# EAGLE board ya (EAGLE 9.0.1)
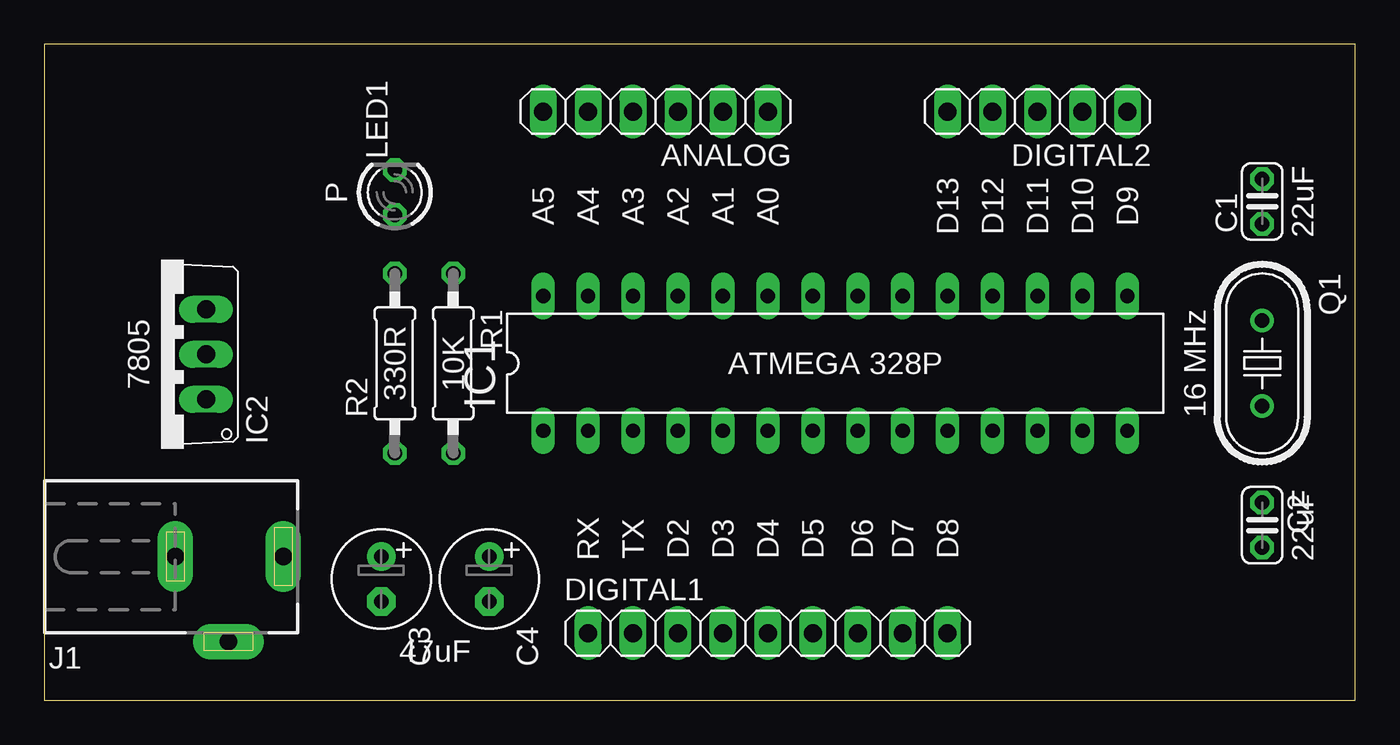
[diagram p0: board, top side]
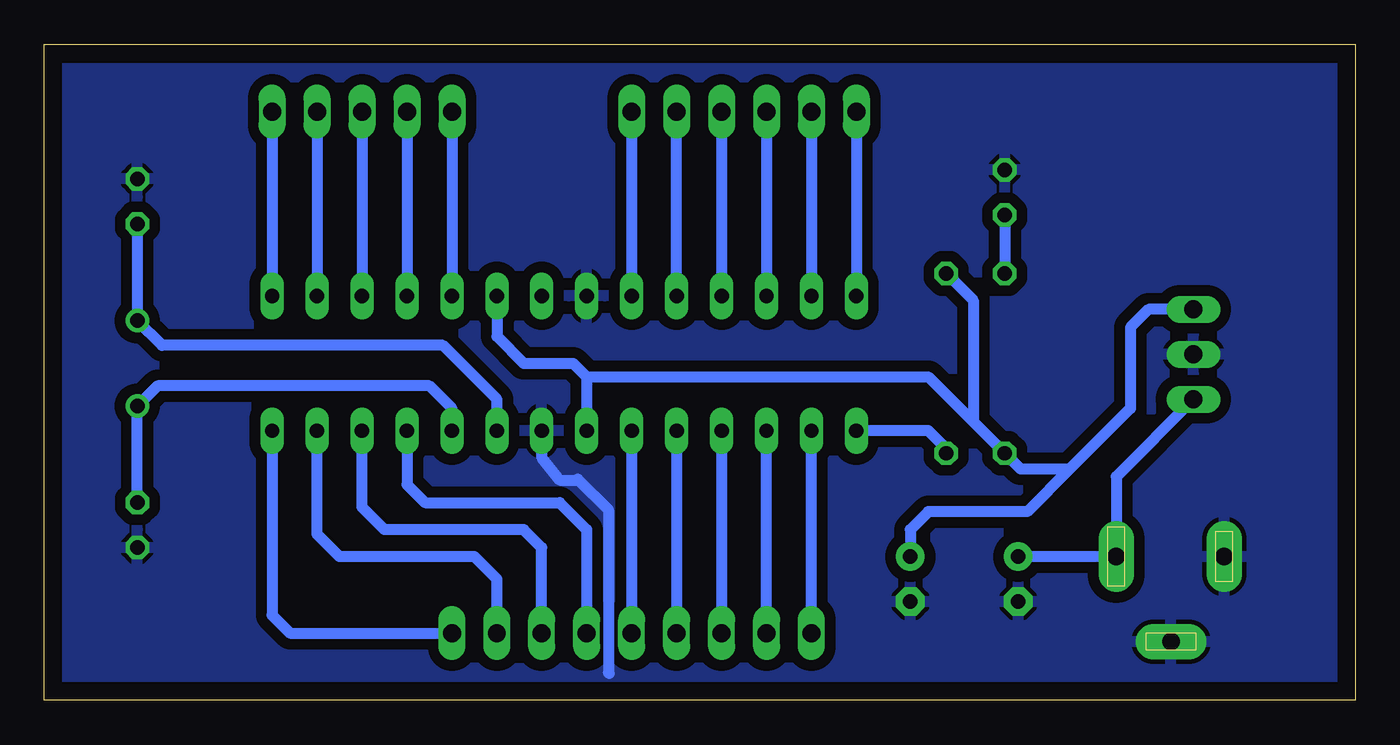
[diagram p1: board, bottom side, seen from below]

Size 74.09 x 37.07 mm. Coordinates in mm from the lower left corner, seen from the top.
Outline: 0,0 74.09,0 74.09,37.07 0,37.07 0,0
Copper layers (1*16): Top 0.035mm / dielectric 1.5mm / Bottom 0.035mm
Design rules "default": minimum track width 6mil, minimum drill 0.35mm, track to track 6mil, track to pad 6mil, pad to pad 6mil, via to via 6mil, smd to smd 6mil, copper to edge 40mil, drill to drill 6mil, minimum pad ring 10mil, minimum via ring 8mil, stop-mask expansion 4mil, vias tented up to drill 0mil, thermal gap 10mil

## Footprints (pad centres in the part's own frame; a part is rotated, then mirrored left to right if it is on the bottom)
1X06 = drill 1.016 long: 1 -6.35,0; 2 -3.81,0; 3 -1.27,0; 4 1.27,0; 5 3.81,0; 6 6.35,0
C025-024X044 = drill 0.813 octagon: 1 -1.27,0; 2 1.27,0
E2,5-6 = drill 0.813 pad 1.6: + -1.27,0 | drill 0.813 pad 1.6 octagon: - 1.27,0
1X09 = drill 1.016 long: 1 -10.16,0; 2 -7.62,0; 3 -5.08,0; 4 -2.54,0; 5 0,0; 6 2.54,0; 7 5.08,0; 8 7.62,0; 9 10.16,0
1X05 = drill 1.016 long: 1 -5.08,0; 2 -2.54,0; 3 0,0; 4 2.54,0; 5 5.08,0
DIL28-3 = drill 0.813 long: 1 -16.51,-3.81; 2 -13.97,-3.81; 3 -11.43,-3.81; 4 -8.89,-3.81; 5 -6.35,-3.81; 6 -3.81,-3.81; 7 -1.27,-3.81; 8 1.27,-3.81; 9 3.81,-3.81; 10 6.35,-3.81; 11 8.89,-3.81; 12 11.43,-3.81; 13 13.97,-3.81; 14 16.51,-3.81; 15 16.51,3.81; 16 13.97,3.81; 17 11.43,3.81; 18 8.89,3.81; 19 6.35,3.81; 20 3.81,3.81; 21 1.27,3.81; 22 -1.27,3.81; 23 -3.81,3.81; 24 -6.35,3.81; 25 -8.89,3.81; 26 -11.43,3.81; 27 -13.97,3.81; 28 -16.51,3.81
TO220V = drill 1.016 long: 1 -2.54,-2.54; 2 0,-2.54; 3 2.54,-2.54
DCJ0303 = drill 1 pad 2 long: 1 0,3.1; 2 4.8,0; 3 0,-3
LED3MM = drill 0.813 octagon: A -1.27,0; K 1.27,0
HC49U70 = drill 0.813: 1 -2.413,0; 2 2.413,0
0207/10 = drill 0.813 octagon: 1 -5.08,0; 2 5.08,0

## Placement (x,y rotation side)
ANALOG  [1X06]  34.54,33.27 180 top
C1  22pF  [C025-024X044]  68.83,28.19 90 top
C2  22pF  [C025-024X044]  68.83,9.91 270 top
C3  [E2,5-6]  19.05,6.86 270 top
C4  [E2,5-6]  25.15,6.86 270 top
DIGITAL1  [1X09]  40.89,3.81 0 top
DIGITAL2  [1X05]  56.13,33.27 180 top
IC1  MEGA328-P  [DIL28-3]  44.7,19.05 0 top
IC2  7805TV  [TO220V]  6.6,19.56 90 top
J1  [DCJ0303]  10.41,8.13 270 top
LED1  [LED3MM]  19.81,28.7 90 top
Q1  16MHz  [HC49U70]  68.83,19.05 270 top
R1  10K  [0207/10]  23.11,19.05 270 top
R2  330R  [0207/10]  19.81,19.05 90 top

## Library data of the parts
ANALOG DIGITAL1 DIGITAL2 = pinhead
C1-C4 = rcl; SPICEPREFIX: C
IC1 = atmel; OC_FARNELL: unknown; OC_NEWARK: unknown
IC2 = linear
J1 = con-jack; OC_FARNELL: unknown; OC_NEWARK: unknown
LED1 = led
Q1 = crystal; OC_FARNELL: unknown; OC_NEWARK: unknown
R1 R2 = rcl; SPICEPREFIX: R

## Nets
GND: C1.2 C2.2 C3.- C4.- IC1.8 IC1.22 IC2.2 J1.2 J1.3 LED1.K
N$1: IC1.1 R1.2
N$2: C1.1 IC1.9 Q1.1
N$3: C2.1 IC1.10 Q1.2
N$4: ANALOG.1 IC1.23
N$5: ANALOG.2 IC1.24
N$6: ANALOG.3 IC1.25
N$7: ANALOG.4 IC1.26
N$8: ANALOG.5 IC1.27
N$9: ANALOG.6 IC1.28
N$10: DIGITAL1.1 IC1.2
N$11: DIGITAL1.2 IC1.3
N$12: DIGITAL1.3 IC1.4
N$13: DIGITAL1.4 IC1.5
N$14: DIGITAL1.5 IC1.6
N$15: DIGITAL1.6 IC1.11
N$16: DIGITAL1.7 IC1.12
N$17: DIGITAL1.8 IC1.13
N$18: DIGITAL1.9 IC1.14
N$19: DIGITAL2.1 IC1.15
N$20: DIGITAL2.2 IC1.16
N$21: DIGITAL2.3 IC1.17
N$22: DIGITAL2.4 IC1.18
N$23: DIGITAL2.5 IC1.19
N$24: C3.+ IC2.1 J1.1
N$28: LED1.A R2.2
VCC: C4.+ IC1.7 IC1.20 IC2.3 R1.1 R2.1

## Tracks (layer width: path | path; a pad name or v marks a point on that pad's centre or on a via)
GND
  Bottom 0.61: IC1.8 45.97,13.72 44.96,12.45 43.94,12.45 43.94,12.51 42.22,10.78 42.22,1.58 42.16,1.52
  pour Bottom (isolate 0.61): 0,36.07 73.91,36.07 73.91,24.89 73.91,1.02 73.41,1.02 -0.25,1.02 -0.25,1.78 -0.25,36.07
N$1
  Bottom 0.61: R1.2 23.11,14.22 24.13,15.24 IC1.1
N$2
  Bottom 0.61: IC1.9 48.51,17.02 51.56,20.07 67.44,20.07 Q1.1 C1.1
N$3
  Bottom 0.61: IC1.10 51.05,16.51 52.32,17.78 67.69,17.78 Q1.2 C2.1
N$4
  Bottom 0.61: ANALOG.1 IC1.23
N$5
  Bottom 0.61: IC1.24 ANALOG.2
N$6
  Bottom 0.61: ANALOG.3 IC1.25
N$7
  Bottom 0.61: ANALOG.4 IC1.26
N$8
  Bottom 0.61: ANALOG.5 IC1.27
N$9
  Bottom 0.61: ANALOG.6 IC1.28
N$10
  Bottom 0.61: DIGITAL1.1 IC1.2
N$11
  Bottom 0.61: DIGITAL1.2 IC1.3 33.27,16
N$12
  Bottom 0.61: IC1.4 DIGITAL1.3
N$13
  Bottom 0.61: IC1.5 DIGITAL1.4
N$14
  Bottom 0.61: IC1.6 DIGITAL1.5
N$15
  Bottom 0.61: IC1.11 53.59,12.19 52.58,11.18 44.96,11.18 43.43,9.65 DIGITAL1.6
N$16
  Bottom 0.61: DIGITAL1.7 45.97,8.64 46.99,9.65 54.86,9.65 56.13,10.92 IC1.12
N$17
  Bottom 0.61: DIGITAL1.8 48.51,6.86 49.78,8.13 57.4,8.13 58.67,9.4 IC1.13
N$18
  Bottom 0.61: IC1.14 61.21,4.83 60.2,3.81 DIGITAL1.9
N$19
  Bottom 0.61: DIGITAL2.1 IC1.15
N$20
  Bottom 0.61: DIGITAL2.2 IC1.16
N$21
  Bottom 0.61: DIGITAL2.3 IC1.17
N$22
  Bottom 0.61: DIGITAL2.4 IC1.18
N$23
  Bottom 0.61: DIGITAL2.5 IC1.19
N$24
  Bottom 0.61: C3.+ J1.1 13.51,12.65 IC2.1
N$28
  Bottom 0.61: LED1.A R2.2
VCC
  Bottom 0.61: IC2.3 11.68,22.1 12.7,21.08 12.7,16.51 16.13,13.08 | C4.+ 25.15,9.65 24.13,10.67 18.54,10.67 16.13,13.08 | 16.13,13.08 18.92,13.08 R2.1 21.59,15.75 | R1.1 21.59,22.61 21.59,15.75 | IC1.20 48.51,20.57 46.99,19.05 44.2,19.05 43.43,18.29 | 43.43,18.29 IC1.7 | 43.43,18.29 24.13,18.29 21.59,15.75

## Text on the board
tPlace: P | A5 | A4 | A3 | A2 | A1 | A0 | D13 | D12 | D11 | D10 | D9 | 22uF | 7805 | 330R | 10K | ATMEGA 328P | 16 MHz | 22uF | RX | TX | D2 | D3 | D4 | D5 | D6 | D7 | D8 | 47uF